# Altium PCB Power_PCB.PcbDoc
Units mil, origin at the board's own origin, x right, y up, seen from the top; angles counter-clockwise.
Board outline 3555.12 x 3523.62 mil, 2 copper layers (Top Layer 1, Bottom Layer 1); 42 components, 26 nets, 116 pads, 60 vias.
Unrouted connection lines stored in the file: 1.
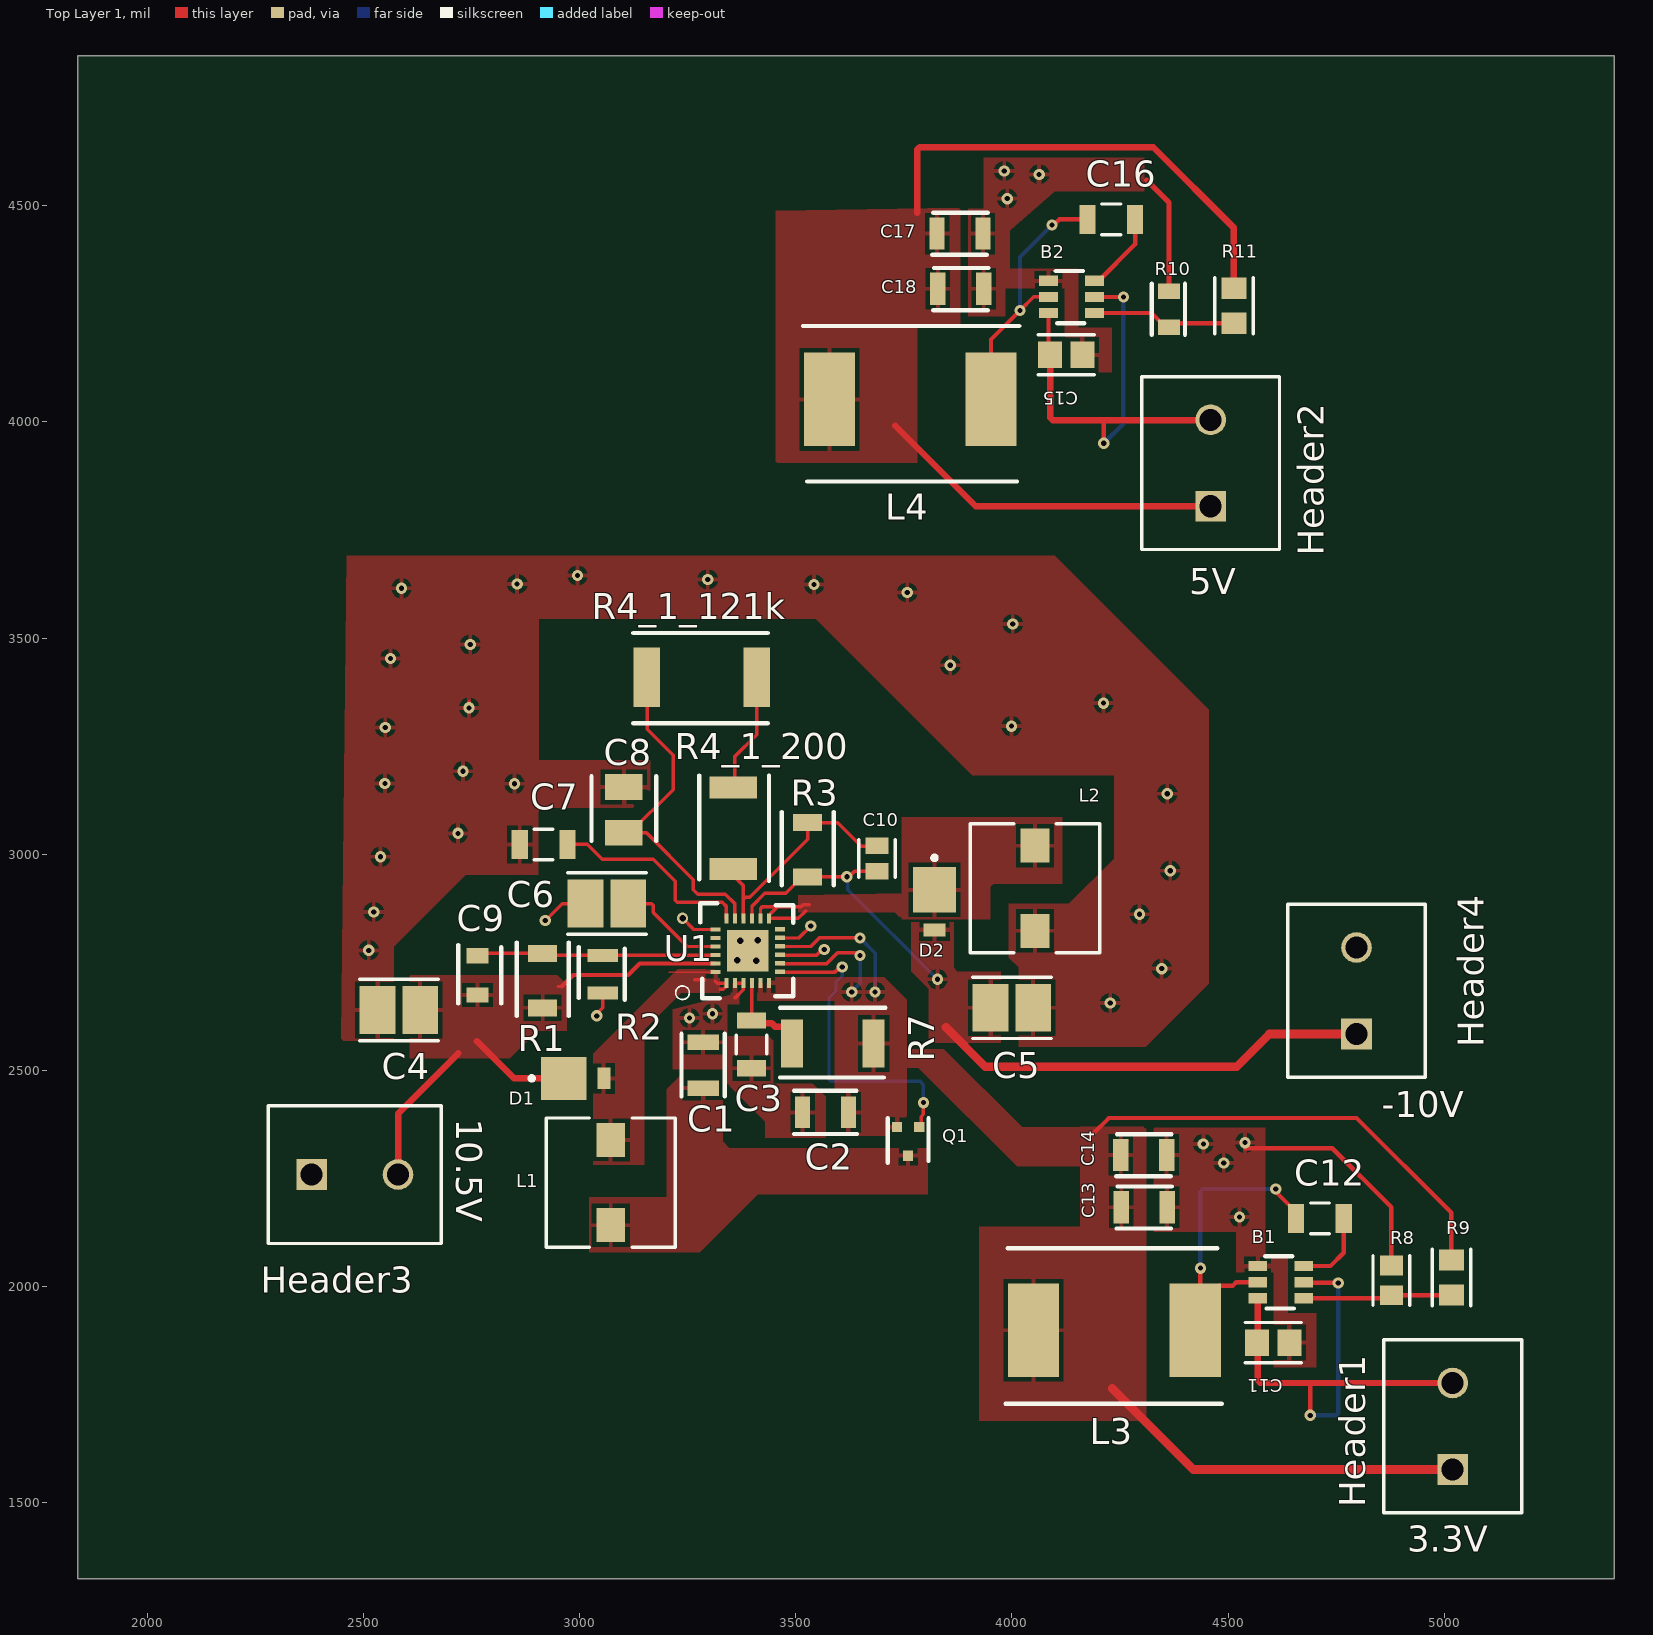
[diagram p0: Top Layer 1 view]
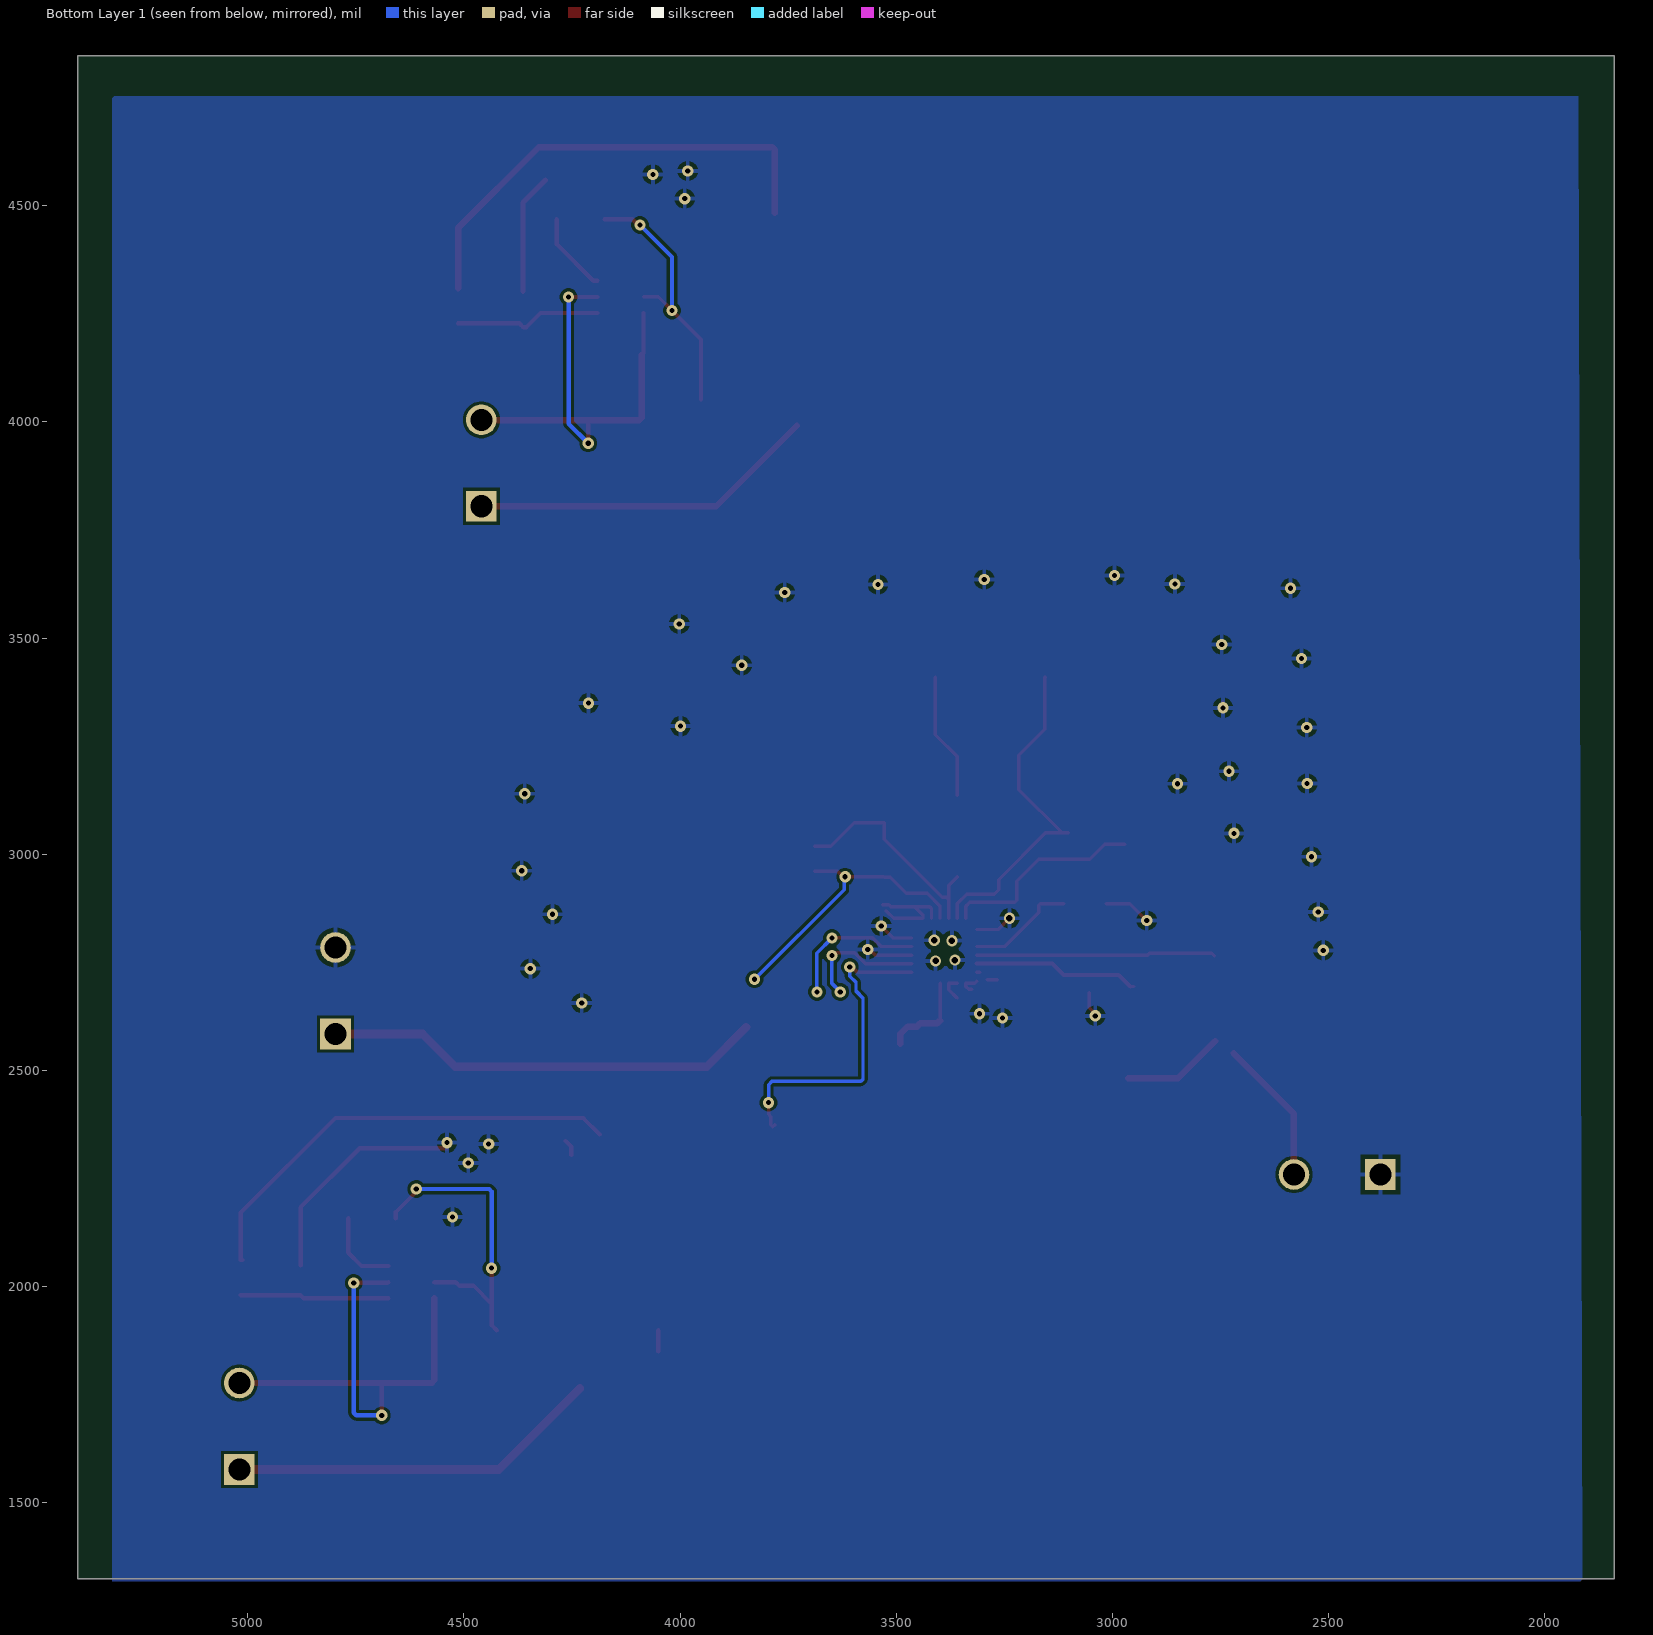
[diagram p1: Bottom Layer 1 view, seen from below]

## Layer stack, top to bottom
Top Solder: solder mask 0.4, Solder Resist, Dk 3.5
Top Layer 1: signal copper 1.378
Dielectric 1: dielectric 12.6, FR-4, Dk 4.8
Bottom Layer 1: signal copper 1.378
Bottom Solder: solder mask 0.4, Solder Resist, Dk 3.5

## Board outline
1838.58,1323.82 5393.7,1323.82 5393.7,4847.44 1838.58,4847.44

## Design rules (kind name [scope] priority, off if disabled: settings)
Clearance Clearance_2 [All] p1: gap=7 ignorepadtopadclearanceinfootprint=TRUE
Clearance Clearance_1 [All] p2: gap=7 ignorepadtopadclearanceinfootprint=FALSE
Clearance [All] p3: gap=7 ignorepadtopadclearanceinfootprint=TRUE
PolygonConnect [All] p1: connectstyle=Relief reliefconductorwidth=10 reliefentries=4 polygonreliefangle="90 Angle" airgapwidth=10
RoutingVias [All] p1: holewidth=15 width=50 viastyle="Through Hole" minholewidth=10 minwidth=15 maxholewidth=50 maxwidth=100
SolderMaskExpansion [All] p1: expansion=4 istentingtop=FALSE
Width [All] p1: maxlimit=20 minlimit=8 preferedwidth=8 minimp=50.000000 maximp=50.000000 favimp=50.000000
30 further rules are at their usual default settings.

## Components (designator, comment, footprint, x,y, rotation, side; value= is the part's Value field where it differs from the comment)
B1 "" PCBCOMPONENT_1 4568.9,2047.24 r0 top (schematic designator B2)
B2 "" PCBCOMPONENT_1 4084.65,4326.77 r0 top (schematic designator B3)
C1 "Comment" C1206C475K8PAC7800 3285.43,2564.96 r0 top
C2 "Comment" C1206C475K8PAC7800 3515.75,2402.56 r90 top
C3 "Comment" FP-C1206C-EB-MFG 3397.64,2560.04 r90 top
C4 "Comment" FP-GRM32E-0_3-0_2-IPC_A 2581.69,2639.76 r180 top
C5 "Comment" FP-GRM32E-0_3-0_2-IPC_A 4000,2644.68 r0 top
C6 "Comment" FP-GRM32E-0_3-0_2-IPC_A 3062.99,2885.83 r0 top
C7 "Comment" FP-C1206C-EB-MFG 2916.34,3022.64 r0 top
C8 "Comment" 12063C224JAT2A 3102.36,3155.51 r0 top
C9 "Comment" 885012007027 2763.78,2764.76 r0 top
C10 "C0805C759D5GACTU" FP-C0805C-DN-MFG 3687.99,2990.16 r270 top value="7.5 pF" (schematic designator C64)
C11 "UMK212BBJ225MD-T" FP-0805-L_2_0_0_2-W_1_25-IPC_A 4604.42,1870.08 r0 top (schematic designator C47)
C12 "Comment" FP-C1206C-EB-MFG 4712.6,2157.48 r0 top
C13 "Comment" Cap22uF_C1206C226M4PAC7800 4252.95,2183.07 r90 top value=22uF (schematic designator C49)
C14 "Comment" Cap22uF_C1206C226M4PAC7800 4251.97,2304.13 r90 top value=22uF (schematic designator C50)
C15 "UMK212BBJ225MD-T" FP-0805-L_2_0_0_2-W_1_25-IPC_A 4125.98,4155.51 r0 top (schematic designator C51)
C16 "Comment" FP-C1206C-EB-MFG 4229.93,4468.91 r0 top
C17 "Comment" Cap22uF_C1206C226M4PAC7800 3826.77,4436.02 r90 top value=22uF (schematic designator C53)
C18 "Comment" Cap22uF_C1206C226M4PAC7800 3828.74,4308.07 r90 top value=22uF (schematic designator C54)
D1 "MBRM120ET3G" ONSC-POWERMITE-2-457-04_D_V 3015.75,2481.3 r0 top
D2 "MBRM120ET3G" ONSC-POWERMITE-2-457-04_D_V 3820.87,2864.76 r270 top
Header1 "Comment" PHOE-1729128-2_V#1 5019.69,1676.57 r90 top
Header2 "Comment" PHOE-1729128-2_V#1 4459.65,3904.92 r90 top
Header3 "Comment" PHOE-1729128-2_V#2 2479.72,2258.86 r0 top
Header4 "Comment" PHOE-1729128-2_V#1 4797.24,2684.06 r90 top
L1 "7447789004" WE-PD-S-PB 3071.85,2240.16 r90 top
L2 "7447789004" WE-PD-S-PB 4053.15,2921.26 r90 top
L3 "Comment" MSS1260H-822MED 4050.2,1898.62 r90 top
L4 "Comment" MSS1246H-103MED 3951.77,4052.17 r270 top
Q1 "Comment" PCBComponent_1 3759.84,2369.09 r0 top
R1 "Comment" RMF1206_1Mohm 2914.37,2770.67 r0 top
R2 "Comment" RGV3216P-1303-B-T1 3053.15,2765.75 r0 top
R3 "Comment" RMEF1206FT1M00 3527.56,3072.83 r0 top
R4_1_121k "Comment" RMCF2512FT121k 3155.51,3409.45 r90 top
R4_1_200 "Comment" RMCP2010FT200R 3355.32,3154.53 r0 top
R7 "Comment" RMCP2010FT100R 3491.14,2562.01 r90 top
R8 "RMCF0805FG22K1" FP-RMCF0805-IPC_B 4877.95,2013.78 r270 top (schematic designator R33)
R9 "RK73G2ATTD1003F" FP-RK73G2A-IPC_A 5016.73,2020.67 r270 top (schematic designator R32)
R10 "RMCF0805FT13K7CT-ND" RMCF0805FT13K7_13.7k 4363.19,4219.49 r180 top value=13.7K (schematic designator R35)
R11 "RK73G2ATTD1003F" FP-RK73G2A-IPC_A 4513.78,4268.7 r90 top (schematic designator R34)
U1 "Comment" TPS6513x 3388.78,2776.57 r0 top

## Footprints (in the part's own frame and the unit in brackets; to place one, negate y for a bottom-side part, rotate by r counter-clockwise, add the part's x,y. Pads: shape width x height; smd on the part's side, far side on the other; paste and mask are expansions set on the pad)
12063C224JAT2A [mm] "CAP CER .22uF 25V X7R 1206"
  rect 2.2x1.5 smd: 7(0,0) 8(0,-2.7)
  silkscreen extent -1.91,-3.17 1.91,0.64
885012007027 [mm] "CER 6.8pF 25V C0G/NP0 0805"
  rect 1.3x0.9 smd: 5(0,0) 6(0,-2.3)
  silkscreen extent -1.14,-2.79 1.4,0.64
C1206C475K8PAC7800 [mm] "4.7uF 10VX5R 1206"
  rect 1.85x0.9 smd: 13(0,0.003) 14(0,-2.7)
  silkscreen extent -1.27,-3.19 1.27,0.51
Cap22uF_C1206C226M4PAC7800 [mm]
  rect 1.9x0.9 smd: 7(0,0) 8(0,-2.7)
  silkscreen extent -1.25,-2.98 1.22,0.28
FP-0805-L_2_0_0_2-W_1_25-IPC_A [mil]
  rect 55.42x61.5 smd paste+0 mask+0: 1(-37.49,0) 2(37.49,0)
  silkscreen extent -65,-46 65,46, body extent -85,-50 85,50, height 10
FP-C0805C-DN-MFG [mm]
  rect 0.95x1.35 smd paste+0 mask+0: 1(-0.75,0) 2(0.75,0)
  silkscreen extent -1.1,-1.07 1.1,1.07, body extent -1.4,-0.85 1.4,0.85, height 0.25
FP-C1206C-EB-MFG [mm]
  rect 0.95x1.7 smd paste+0 mask+0: 1(-1.4,0) 2(1.4,0)
  silkscreen extent -0.55,-0.9 0.55,0.9, body extent -2,-1 2,1, height 0.25
FP-GRM32E-0_3-0_2-IPC_A [mil]
  rect 82.79x110.48 smd paste+0 mask+0: 1(-49.24,0) 2(49.24,0)
  silkscreen extent -91,-71 91,71, body extent -110,-75 110,75, height 10
FP-RK73G2A-IPC_A [mil]
  rect 49.42x57.56 smd paste+0 mask+0: 1(-40.37,0) 2(40.37,0)
  silkscreen extent -65,-45 65,45, body extent -85,-48 85,48, height 10
FP-RMCF0805-IPC_B [mil]
  rect 45.46x53.63 smd paste+0 mask+0: 1(-34.48,0) 2(34.48,0)
  silkscreen extent -57,-43 57,43, body extent -67,-37 67,37, height 10
MSS1246H-103MED [mm] "10uH"
  rect 5.5x3 smd: 3(0,0) 4(0,-9.5)
  silkscreen extent -4.32,-11.05 4.83,1.65
MSS1260H-822MED [mm] "8.2uH SMD"
  rect 5.5x3 smd: 3(0,0) 4(0,-9.5)
  silkscreen extent -4.32,-11.05 4.83,1.65
ONSC-POWERMITE-2-457-04_D_V [mil] "POWERMITE, 2-Leads, Body 1.965x1.9mm"
  rect 105.12x100 smd: 1(-52.56,0)
  rect 30x50 smd: 2(40,0)
  silkscreen extent -132,-5 -122,5, body extent -80,-37 -3,37, height 45
PCBCOMPONENT_1 [mm]
  rect 1.1x0.6 smd: CB(2.7,0) EN(2.7,-0.96) FB(2.7,-1.9) GND(0,0) SW(0,-0.95) VIN(0,-1.9)
  silkscreen extent 0.43,-2.5 2.11,0.57
PCBComponent_1 [mm]
  rect 0.6x0.6 smd: 15(-0.65,0) 16(0.65,0) 17(0,-1.7)
  silkscreen extent -1.2,-2.1 1.2,0.5
PHOE-1729128-2_V#1 [mm] "Receptacle, 2-Leads, Body 8.1x10.16mm, Pitch 5.08mm"
  rect 1.8x1.8 hole 1.3: 1(-2.54,0)
  round 1.8 hole 1.3: 2(2.54,0)
  silkscreen extent -5.08,-4.05 5.08,4.05, body extent -5.65,-4.05 5.08,4.05, height 10.01
PHOE-1729128-2_V#2 [mm] "Receptacle, 2-Leads, Body 8.1x10.16mm, Pitch 5.08mm"
  rect 1.8x1.8 hole 1.3: 1(-2.54,0)
  round 1.8 hole 1.3: 10.5(2.54,0)
  silkscreen extent -5.08,-4.05 5.08,4.05, body extent -5.65,-4.05 5.08,4.05, height 10.01
RGV3216P-1303-B-T1 [mm] "130kohm .1% .25W 1/4W 1206"
  rect 1.8x0.75 smd: 3(0,0) 4(0,-2.2)
  silkscreen extent -1.4,-2.6 1.3,0.5
RMCF0805FT13K7_13.7k [mm]
  rect 1.3x0.9 smd: 9(0,0) 10(0,-2.1)
  silkscreen extent -0.95,-2.55 1,0.45
RMCF2512FT121k [mm] "121k ohm RES 1% 1W 2512"
  rect 3.5x1.55 smd: 1(0,0) 2(0,-6.45)
  silkscreen extent -2.7,-7.1 2.6,0.8
RMCP2010FT100R [mm] "100 ohm 1% 1W 2010"
  rect 2.8x1.3 smd: 9(0,0) 10(0,-4.8)
  silkscreen extent -2,-5.5 2.1,0.7
RMCP2010FT200R [mm] "200 ohm 1% 1W 2010"
  rect 2.8x1.3 smd: 9(0,0) 10(0,-4.8)
  silkscreen extent -2,-5.5 2.1,0.7
RMEF1206FT1M00 [mm] "RES 1Mohm 1% 1/4W 1206"
  rect 1.7x1 smd: 1(0,0) 2(0,-3.2)
  silkscreen extent -1.52,-3.68 1.52,0.64
RMF1206_1Mohm [mm]
  rect 1.7x1 smd: 1(0,0) 2(0,-3.2)
  silkscreen extent -1.52,-3.68 1.52,0.64
TPS6513x [mm] "boost and inverter"
  rect 2.45x2.45 smd: 1(0,0)
  rect 0.6x0.25 smd: AGND(-1.9,1.254) BSW(1.9,-1.23) CP(-1.9,0.254) ENN(1.9,0.27) ENP(1.9,-0.73) FBP(-1.9,-0.246) INP(-1.9,-1.246) NC(-1.9,0.754) NC(1.9,1.27) PSN(1.9,0.77) PSP(1.9,-0.23) VPOS(-1.9,-0.746)
  rect 0.25x0.6 smd: CN(-1.254,1.9) FBN(-0.254,1.9) INN(0.746,-1.9) INN(1.246,-1.9) INP(-1.254,-1.9) OUTN(0.746,1.9) OUTN(1.246,1.9) PGND(-0.754,-1.9) PGND(-0.254,-1.9) VIN(0.246,-1.9) VNEG(0.246,1.9) VREF(-0.754,1.9)
  silkscreen extent -4.23,-2.87 2.67,2.79
WE-PD-S-PB [mm] "SMD Inductor, 2-Leads, Body 7.3x7.3x3.5 mm"
  rect 2x1.7 smd: 1(-2.5,0) 2(2.5,0)
  silkscreen extent -3.8,-3.8 3.8,3.8, body extent -3.65,-3.65 3.65,3.65, height 3.19

## Part data
B1 B2: library part Component_1
C1 C2 C3 C4 C8: library part CMP-2000-05439-1, "Chip Capacitor, 100 nF, +/- 10%, 16 V, -55 to 125 degC, 0402 (1005 Metric), RoHS, Tape and Reel / CL05B104KO5NNNC"
C5: library part CMP-2006-02792-2, "Chip Multilayer Ceramic Capacitors for General Purpose, 0603, 10uF, X5R, 15%, 20%, 6.3V / GRM188R60J106ME47D"
C6 C7: library part CMP-2008-04271-1, "GRM1555C1H180GA01D"
C9: library part CMP-2007-01008-2, "CAP CER 47UF 6.3V X5R 0805 / C0805C476M9PACTU"
C10: library part CMP-1036-00734-2, "CAP CER 7.5PF 50V NP0 0805", Capacitance="7.5 pF", Manufacturer=KEMET, Package=C0805C-DN, Temperature="-55°C to +125°C", Temperature Characteristic=C0G, Temperature Coefficient=30ppm/°C, Temperature Range High=+125°C, Temperature Range Low=-55°C, Tolerance="0.5 pF", Voltage Rating="50 V", Automotive=No, Category=Cap, ComponentLink2Description=Datasheet, ComponentLink2URL=https://content.kemet.com/datasheets/KEM_C1003_C0G_SMD.pdf, Device Class L1="Passive Components", Device Class L2=Capacitors, Device Class L3="Ceramic Capacitors", Digikey Description="CAP CER 7.5PF 50V NP0 0805", Height=0.88mm, Ipc Land Pattern Name=CAPC200125X78, Lead Free=Yes, Manufacturer Part Number=C0805C759D5GACTU, Material=Ceramic, Mouser Description="Multilayer Ceramic Capacitors MLCC - SMD/SMT 50volts 7.5pF C0G 0.5%", Octopart=https://octopart.com/c0805c759d5gactu-kemet-17134963, RoHS=TRUE
C11 C15: library part CMP-14477-004278-2, "Multilayer Ceramic Capacitor 2.2uF 50V X5R 20% SMD 0803 T/R", Capacitance=2.2uF, Case Code (Imperial)=0805, Case Code (Metric)=2012, Max Operating Temperature=85°C, Min Operating Temperature=-55°C, Tolerance=20%, Voltage Rating=50V, Case/Package=0805, Mount="Surface Mount", Packaging="Tape and Reel", RoHS Compliant=Yes
C12: library part CMP-2006-02836-2, "Chip Multilayer Ceramic Capacitors for General Purpose, 0603, 2.2uF, X7R, 15%, 10%, 10V / GRM188R71A225KE15D"
C13 C14 C17 C18: library part Cap, "Capacitor", LatestRevisionDate=17-Jul-2002, LatestRevisionNote="Re-released for DXP Platform.", PackageDescription="Radial Cap, Thru-Hole; 2 Leads; 0.3 in Pin Spacing", PackageReference=RAD-0.3, Published=8-Jun-2000, Publisher="Altium Limited"
C16: library part CMP-2000-05002-2, "CAP CER 0.1UF 16V X7R 0603"
D1 D2: library part CMP-1055-00280-1, "Schottky Power Rectifier, 2-Pin Powermite, Pb-Free, Tape and Reel", Manufacturer="On Semiconductor", ComponentLink1Description="Manufacturer URL", ComponentLink1URL=http://www.onsemi.com/, ComponentLink2Description=Datasheet, ComponentLink2URL=http://www.onsemi.cn/pub_link/Collateral/MBRM120E-D.PDF, ComponentLink3Description="Package Specification", ComponentLink3URL=http://www.onsemi.com/pub_link/Collateral/457-04.PDF, Configuration=Single, DatasheetVersion="Rev. 3", IFSM Max (A)=50, Mounting Technology="Surface Mount", PackageDescription="2-Pin POWERMITE, Body 1.965 x 1.9 mm", PackageReference=POWERMITE-2-457-04, PackageVersion="Rev. F, 05/2013", Packing="Tape and Reel", PartNumber=MBRM120ET3G, RoHS=TRUE
L1 L2: library part CMP-1396-00050-1, "SMD-Shielded Power Inductor WE-PD, L=4.70 µH", Inductance="4.70 ÂµH", Manufacturer="Wuerth Elektronik", ComponentLink1Description="Manufacturer URL", ComponentLink1URL=http://www.we-online.com, ComponentLink2Description=Datasheet, ComponentLink2URL=http://www.we-online.de/katalog/media/pdf/7447789004.pdf, PackageDescription="SMD Inductor, 2-Leads, Body 7.3 x 7.3 mm", PackageReference=WE-PD-S-PB, PartNumber=7447789004
L3 L4: library part Inductor, "Inductor"
Q1: library part MOSFET-P, "P-Channel MOSFET", LatestRevisionDate=17-Jul-2002, LatestRevisionNote="Re-released for DXP Platform.", PackageDescription="TO, Flat Index; 3 In-Line, Axial Leads; Body Dia. 4.6mm; Lead Dia. 0.5 mm (max)", PackageReference=E3, PackageVersion=1995/1996, Published=8-Jun-2000, Publisher="Altium Limited"
R1: library part CMP-1011-00001-2, "RC0402JR-070RL"
R2: library part CMP-2002-00609-3, "Chip Resistor, 1 MOhm, +/- 1%, 100 mW, -55 to 155 degC, 0402 (1005 Metric), RoHS, Tape and Reel / ERJ-2RKF1004X"
R3: library part CMP-2000-07588-1, "Chip Resistor, 10 KOhm, +/- 1%, 0.1 W, -55 to 155 degC, 0402 (1005 Metric), RoHS, Tape and Reel / ERJ2RKF1002X"
R7: library part CMP-2100-03671-1, "Chip Resistor, 1 KOhm, +/- 1%, 125 mW, -55 to 155 degC, 0805 (2012 Metric), RoHS, Tape and Reel"
R8: library part CMP-26527-006791-1, "22.1kΩ ±1% 0.125W 0805 Thick Film Chip Resistor AEC-Q200 compliant", Case Code (Imperial)=0805, Case Code (Metric)=2012, Max Operating Temperature=155°C, Max Power Dissipation=125mW, Min Operating Temperature=-55°C, Package Quantity=10000, Resistance=22.1kR, Resistor Type="Thick Film", Temperature Coefficient=100ppm/°C, Tolerance=1%, Case/Package=0805, Contact Plating=Tin, Features="Automotive AEC-Q200", Height=0.026inch, Lead Free="Lead Free", Length=0.079inch, Mount="Surface Mount", Number of Terminations=2, Packaging="Tape and Reel", Radiation Hardening=No, RoHS Compliant=Yes, Series=RMCF, Width=0.049inch
R9 R11: library part CMP-04015-080178-1, "100kΩ ±1% 0.125W Chip Resistor 0805 Thick Film AEC-Q200 Qualified", Case Code (Imperial)=0805, Case Code (Metric)=2012, Max Operating Temperature=125°C, Min Operating Temperature=-55°C, Power Rating=125mW, Resistance=100kR, Temperature Coefficient=50ppm/°C, Tolerance=1%, Voltage Rating=150V, Packaging="Tape and Reel", RoHS Compliant=Yes, Series=RK73G, Termination=SMD/SMT
R10: library part Res1, "Resistor", LatestRevisionDate=17-Jul-2002, LatestRevisionNote="Re-released for DXP Platform.", PackageDescription="Axial Device, Thru-Hole; 2 Leads; 0.3 in Pin Spacing", PackageReference=AXIAL-0.3, Published=8-Jun-2000, Publisher="Altium Limited"

## Via types
v1: diameter 26, hole 12, Top Layer 1 to Bottom Layer 1, 55 vias
v2: diameter 26, hole 15, Top Layer 1 to Bottom Layer 1, 5 vias

## Nets (pads, with @x,y where several pads share a name; then routed paths per layer and width w, separated by ;. In a path a pad name is that pad's centre, name@x,y a point inside that pad or via, vN(x,y) a via of type N, cw(c..) or ccw(c..) an arc to the next point about the centre after c; other vN are vias at no path point)
3.3V: C2.14 C13.7 C14.7 Header1.1 L3.3 Q1.15 R7.10 R9.1 U1.ENN U1.ENP U1.INN | length 2625.2
  Top Layer 1 w8: U1.ENP@3463.58,2747.05 3571.85,2747.05 3596.46,2771.65 3637.85,2771.65 3643.75,2765.75 v1(3648.62,2765.75) ; U1.ENN@3463.58,2786.42 3534.65,2786.42 3554.76,2806.53 3648.2,2806.53 v1(3648.62,2806.1)
  Top Layer 1 w10: L3.3@4050.2,1849.41 L3.3 ; 4186.02,2351.38 4224.41,2389.76 4797.24,2389.76 5016.73,2170.28 R9.1 R9.1@5012.66,2061.04 ; C14.7 4251.97,2323.82 C14.7@4264.69,2336.54
  Top Layer 1 w20: 4232.28,1763.78 4419.49,1576.57 Header1.1
  Bottom Layer 1 w8: v1(3629.27,2681.49) 3648.62,2700.84 v1(3648.62,2765.75) ; v1(3648.62,2806.1) 3683.41,2771.32 v1(3683.41,2681.49)
5V: C17.7 C18.7 Header2.1 L4.4 R11.2 | length 1907.9
  Top Layer 1 w10: 3778.54,4482.28 3780.51,4484.25
  Top Layer 1 w15: 3730.31,3991.14 3916.54,3804.92 Header2.1 ; 3780.51,4484.25 3780.51,4629.97 3786.37,4635.83 4326.77,4635.83 4513.78,4448.82 R11.2
10.5V: C4.1 C9.6 D1.1 Header3.10.5 R1.2 U1.VPOS | length 959.6
  Top Layer 1 w8: 2950.79,2693.9 2958.66,2693.9
  Top Layer 1 w10: 2958.66,2693.9 2985.24,2720.47 3112.2,2720.47 3138.78,2747.05 U1.VPOS@3313.98,2747.05
  Top Layer 1 w15: Header3.10.5 2579.72,2399.61 2719.16,2539.04 ; 2762.31,2567.29 2848.3,2481.3 D1.1
-10V: C5.1 C10.2 D2.2 Header4.1 R3.2 U1.VNEG | length 1694.7
  Top Layer 1 w8: U1.VNEG@3398.62,2851.38 3398.62,2880.02 3428.05,2909.45 3476.38,2909.45 3513.78,2946.85 R3.2 3528.54,2947.83 v1(3618.11,2947.83) 3622.98,2947.83 3635.78,2960.63 C10.2
  Top Layer 1 w20: 3847.44,2599.41 3938.98,2507.87 4519.69,2507.87 4595.87,2584.06 Header4.1
  Bottom Layer 1 w8: v1(3618.11,2947.83) 3620.42,2945.52 3620.42,2917.96 v1(3827.76,2710.63)
BSW: Q1.16 U1.BSW | length 753.5
  Top Layer 1 w8: U1.BSW@3463.58,2727.36 3590.6,2727.36 3602.41,2739.17 v1(3607.28,2739.17) ; Q1.16@3780.51,2374.02 Q1.16 3790.27,2373.93 3790.27,2392.91 3795.28,2397.91 v1(3795.28,2425.2)
  Bottom Layer 1 w8: v1(3607.28,2739.17) 3607.28,2717.88 3593.01,2703.6 3593.01,2683.42 3576.77,2667.18 3576.77,2479.1 3581.46,2474.41 3787.4,2474.41 3795.28,2466.54 v1(3795.28,2425.2)
CB1: B1.CB C12.2 | length 184.9
  Top Layer 1 w10: B1.CB 4737.2,2047.24 4767.72,2077.76 C12.2
CB2: B2.CB C16.2 | length 186.9
  Top Layer 1 w10: B2.CB 4200.79,4326.77 4285.05,4411.04 C16.2
CN: C7.2 U1.CN | length 480.7
  Top Layer 1 w8: C7.2 3017.72,3022.64 3052.17,2988.19 3170.28,2988.19 3221.46,2937.01 3221.46,2893.47 3226.14,2888.78 3329.72,2888.78 3339.57,2878.94 U1.CN@3339.57,2851.38
CP: C6.2 U1.CP | length 252.6
  Top Layer 1 w8: C6.2 3166.05,2885.83 3170.28,2881.6 3170.28,2865.09 3248.95,2786.42 U1.CP@3313.98,2786.42
EN1: 
EN2: 
FB1: B1.FB R8.2 R9.2 | length 344.8
  Top Layer 1 w10: B1.FB 4871.09,1972.44 R8.2 5015.74,1979.3 R9.2
FB2: B2.FB R10.9 R11.1 | length 339.9
  Top Layer 1 w10: B2.FB 4322.83,4251.97 4355.31,4219.49 R10.9 4372.03,4228.33 R11.1
FBN: C10.1 R3.1 R4_1_200.10 U1.FBN | length 532.3
  Top Layer 1 w8: R4_1_200.10@3358.27,2947.83 3378.94,2927.17 3378.94,2895.9 ; U1.FBN@3378.94,2851.38 3378.94,2895.9 ; C10.1@3687.99,3018.7 3651.57,3018.7 3597.44,3072.83 R3.1 3527.56,3034.41 3393.74,2900.59 3383.62,2900.59 3378.94,2895.9
FBP: C9.5 R1.1 R2.3 U1.FBP | length 555.1
  Top Layer 1 w8: C9.5 2769.68,2770.67 R1.1 2919.29,2765.75 R2.3 3054.13,2766.73 U1.FBP@3313.98,2766.73
GND: B1.GND B2.GND C1.13 C2.13 C3.1 C4.2 C5.2 C6.1 C7.1 C8.7 C11.2 C13.8 C14.8 C15.2 C17.8 C18.8 Header3.1 Header4.2 L2.1 R2.4 R8.1 R10.10 U1.1 U1.AGND U1.PGND U1.PSN U1.PSP | length 1331.3
  Top Layer 1 w8: v1(2744.09,3338.58) 2744.09,3352.58 ; v1(2920.28,2846.46) 2959.65,2885.83 C6.1 ; v1(3039.37,2625.98) 3039.37,2630.86 3053.15,2644.63 R2.4 ; v2(3238,2852) 3264.21,2825.79 U1.AGND@3313.98,2825.79 ; 3359.25,2667.32 3378.21,2686.28 3378.21,2701.05 3378.94,2701.77 U1.PGND@3359.25,2701.77 ; U1.PSP@3463.58,2766.73 3548.28,2766.73 3561.07,2779.53 v1(3565.94,2779.53) ; U1.PSN@3463.58,2806.1 3506.89,2806.1 v1(3534.45,2833.66)
  Top Layer 1 w10: v1@4539.37,2319.88 4741.14,2319.88 4877.95,2183.07 R8.1
  Top Layer 1 w12: 4311.02,4560.04 4363.19,4507.87 R10.10
  other v1: 4526.57,2160.43 4490.16,2285.43 4442.91,2329.72 4539.37,2332.68 3253.94,2621.06 3307.09,2630.91 4227.36,2655.51 4346.46,2735.24 2511.81,2777.56 4295.28,2861.22 2523.62,2866.14 4366.14,2961.61 2539.37,2994.09 2718.5,3048.23 4359.25,3139.76 2549.21,3163.39 2849,3163 2730.32,3191.93 2550.2,3293.31 3999.02,3296.26 4211.8,3349.49 3857.28,3437.01 2562.01,3452.76 2746.86,3485 4001.97,3532.48 3757.87,3605.32 2587.6,3615.16 3542.4,3623.94 2855.32,3625 3296.26,3635.83 2995.08,3644.68 3989.17,4516.73 4062.99,4572.83 3982.28,4580.71
  other v2: 3409,2753 3364,2755 3371,2800 3412,2801
I1: C1.14 L1.1 Q1.17
I2: R4_1_121k.2 R4_1_200.9 | length 293.8
  Top Layer 1 w8: R4_1_200.9@3358.27,3136.81 3358.27,3225.39 3409.45,3276.57 R4_1_121k.2
I3: 
INP: D1.2 L1.2 U1.INP | length 82.2
  Top Layer 1 w8: 3265.75,2709.65 3289.17,2709.65 ; U1.INP@3306.89,2727.36 U1.INP@3313.98,2727.36 ; 3313.98,2706.46 3318.66,2701.77 3339.57,2701.77 3339.57,2694.69 3332.15,2687.27 3325.54,2687.27
OUTN: D2.1 L2.2 U1.OUTN | length 268.6
  Top Layer 1 w8: U1.OUTN@3418.31,2851.38 3418.31,2874.25 3422.99,2878.94 3458.46,2878.94 ; 3523.62,2869.09 3505.91,2851.38 3437.99,2851.38 3437.99,2858.46 3458.46,2878.94 ; 3531.5,2882.87 3516.73,2882.87 3512.8,2878.94 3458.46,2878.94
SW1: B1.SW C12.1 L3.4 | length 743.6
  Top Layer 1 w10: L3.4 4436.02,1910.43 L3.4@4436.02,1959.65 ; v1(4436.02,2042.32) L3.4@4436.02,1959.65 ; B1.SW 4519.23,2009.84 4511.28,2001.89 4478.27,2001.89 L3.4@4436.02,1959.65 ; v1(4610.24,2225.39) 4613.3,2222.33 4613.3,2216.43 4657.48,2172.24 C12.1
  Bottom Layer 1 w10: v1(4436.02,2042.32) 4436.02,2219.54 4441.88,2225.39 v1(4610.24,2225.39)
SW2: B2.SW C16.1 L4.3 | length 628.6
  Top Layer 1 w8: v1(4018.7,4257.87) 4050.2,4289.37 B2.SW
  Top Layer 1 w10: L4.3 3951.77,4190.94 v1(4018.7,4257.87) ; v1(4092.52,4455.71) 4096.85,4455.71 4110.05,4468.91 C16.1
  Bottom Layer 1 w10: v1(4018.7,4257.87) 4018.7,4381.89 v1(4092.52,4455.71)
Vin: B1.EN B1.VIN B2.EN B2.VIN C11.1 C15.1 Header1.2 Header2.2 | length 2262.4
  Top Layer 1 w10: B2.VIN 4084.65,4159.36 C15.1 ; B2.EN 4191.14,4289.17 4257.68,4289.17 v1(4257.87,4289.37) ; v1(4212.6,3950.79) 4212.6,4002.95 4213.58,4003.94 ; Header2.2@4458.66,4003.94 Header2.2 ; 4568.9,1782.43 4574.76,1776.57 ; B1.EN 4676.02,2008.62 4754.33,2008.62 v1(4755.16,2007.79) ; v1(4690.2,1701.69) 4690.2,1775.83 4690.94,1776.57
  Top Layer 1 w15: C15.1 4088.5,4009.8 4094.35,4003.94 4213.58,4003.94 Header2.2@4458.66,4003.94 ; 4568.9,1782.43 B1.VIN ; 4574.76,1776.57 4690.94,1776.57 Header1.2
  Bottom Layer 1 w10: v1(4212.6,3950.79) 4257.87,3996.06 v1(4257.87,4289.37) ; v1(4690.2,1701.69) 4749.31,1701.69 4755.16,1707.55 v1(4755.16,2007.79)
VinBI: C3.2 R7.9 U1.VIN | length 215
  Top Layer 1 w8: C3.2@3398.62,2615.16 C3.2 3397.64,2685.3 3397.66,2691.1 3397.9,2691.33 3397.9,2701.05 U1.VIN@3398.62,2701.77
  Top Layer 1 w15: C3.2@3398.62,2615.16 3405.44,2608.34 3444.81,2608.34 3451.84,2601.31 3473.05,2601.31 3491.14,2583.22 R7.9
VREF: C8.8 R4_1_121k.1 U1.VREF | length 798.6
  Top Layer 1 w8: C8.8 C8.8@3116.14,3049.21 ; R4_1_121k.1 3156,3408.96 3156,3289 3216,3229 3216,3149.07 C8.8@3116.14,3049.21 ; U1.VREF@3359.25,2851.38 3359.25,2885.08 3336.57,2907.76 3273.2,2907.76 3262.8,2918.17 3262.8,2940.94 3154.53,3049.21 C8.8@3116.14,3049.21
pads on no net: U1.NC

## Polygon pours and split planes (outlines as drawn)
GND on Top Layer 1 "GND_L01_P022" (solid, pour order 22): 2447.83,2568.9 2448.82,2567.91 2569.88,2567.91 2569.88,2786.42 2736.22,2952.76 2904.53,2952.76 2904.53,3097.44 2905.51,3098.43 2905.51,3545.28 3546.26,3545.28 3908.46,3183.07 4236.22,3183.07 4236.22,2989.17 4131.89,2884.84 3993.11,2884.84 3993.11,2760.83 4015.94,2738 4015.94,2554.02 4309.92,2554.02 4455.71,2699.8 4455.71,3334.65 4099.41,3690.94 2460.63,3690.94
GND on Top Layer 1 "GND_L01_P029" (solid, pour order 29): 2898,3217 3163,3217 3163,3148 3123,3108 2898,3108
INP on Top Layer 1 "INP_L01_P014" (solid, pour order 14): 3226.55,2733.44 3031.5,2538.39 3031.5,2281.5 3149.61,2281.5 3149.61,2593.5 3235.24,2679.13 3325.79,2679.13 3325.79,2735.27
no net on Top Layer 1 "NONET_L01_P013" (solid, pour order 13): 3313.98,2727.36 3205.71,2727.36
GND on Top Layer 1 "GND_L01_P011" (solid, pour order 11): 3349.41,2715.55 3349.41,2675.2 3215.55,2641.73 3215.55,2502.95 3341.54,2502.95 3341.54,2652.56 3369.09,2652.56 3369.09,2730.32 3349.41,2730.32 3348.43,2731.3
3.3V on Top Layer 1 "3.3V_L01_P010" (solid, pour order 10): 3410.43,2715.55 3410.43,2660.43 3590.55,2660.43 3590.55,2348.43 3756.89,2348.43 3756.89,2663.39 3704.72,2715.55
10.5V on Top Layer 1 "10.5V_L01_P016" (solid, pour order 16): 2606.3,2721.39 2606.3,2527.56 2838.58,2527.56 2902.56,2591.54 2970.47,2591.54 2970.47,2697.83 2947.83,2720.47
GND on Top Layer 1 "GND_L01_P025" (solid, pour order 25): 3935.04,4490.87 3935.04,4611.22 4306.1,4611.22 4306.1,4602.36 4306.1,4533.46 4083.66,4533.46 4029.53,4479.33 3974.94,4479.33
GND on Top Layer 1 "GND_L01_P028" (solid, pour order 28): 3341.54,2468.5 3429.13,2380.91 3429.13,2344.49 3567.91,2344.49 3568.9,2345.47 3568.9,2438.98 3539.37,2468.5
GND on Top Layer 1 "GND_L01_P026" (solid, pour order 26): 4131.05,4562.01 4057.62,4562.01 3974.41,4478.8 3974.41,4424.95
3.3V on Top Layer 1 "3.3V_L01_P024" (solid, pour order 24): 3755.91,2550.2 3754.92,2549.21 3756.89,2505.91 3783.46,2505.91 4011.81,2277.56 4164.37,2277.56 4168.31,2281.5 4168.31,2368.11 4023.62,2368.11 3842.52,2549.21
-10V on Top Layer 1 "-10V_L01_P020" (solid, pour order 20): 3865.16,2845.47 3865.16,2737.2 3874.02,2728.35 3974.41,2728.35 3974.41,2563.98 3807.09,2563.98 3807.09,2688.98 3766.73,2729.33 3766.73,2845.47
OUTN on Top Layer 1 "OUTN_L01_P019" (solid, pour order 19): 3505.91,2904.53 3505.91,2865.16 3729.33,2865.16 3745.08,2849.41 3750,2909.46
OUTN on Top Layer 1 "OUTN_L01_P018" (solid, pour order 18): 3949.8,2849.41 3949.8,2924.21 3957.68,2932.09 4116.14,2932.09 4116.14,3085.63 3745.08,3085.63 3745.08,2849.41
I1 on Top Layer 1 "I1_L01_P015" (solid, pour order 15): 3021.65,2206.69 3021.65,2078.74 3277.56,2078.74 3412.4,2213.58 3805.12,2213.58 3805.12,2319.88 3346.46,2319.88 3330.71,2335.63 3330.71,2491.14 3236.22,2491.14 3201.77,2456.69 3201.77,2206.69
GND on Top Layer 1 "GND_L01_P012" (solid, pour order 12): 3341.54,2578.74 3437.99,2578.74 3447.83,2568.9 3447.83,2467.52 3342.52,2467.52 3341.54,2468.5
GND on Top Layer 1 "GND_L01_P009" (solid, pour order 9): 3898.62,4493.11 3898.62,4245.08 3983.27,4245.08 3984.25,4246.06 3984.25,4309.06 4122.05,4309.06 4122.05,4115.16 4231.3,4115.16 4231.3,4218.5 4153.54,4218.5 4153.54,4354.33 3995.08,4354.33 3995.08,4493.11
5V on Top Layer 1 "5V_L01_P008" (solid, pour order 8): 3879.92,4496.06 3879.92,4217.52 3781.5,4217.52 3780.51,4218.5 3780.51,3905.51 3454.72,3905.51 3452.76,3907.48 3453.74,3908.46 3453.74,4489.17
GND on Top Layer 1 "GND_L01_P003" (solid, pour order 3): 4327.76,2368.11 4327.76,2126.97 4518.7,2126.97 4518.7,2032.48 4605.31,2032.48 4605.31,1812.99 4703.74,1812.99 4703.74,1937.99 4638.78,1937.99 4637.8,1938.98 4637.8,2066.93 4581.69,2066.93 4585.63,2070.87 4585.63,2367.13
3.3V on Top Layer 1 "3.3V_L01_P000" (solid, pour order 0): 4303.15,2371.06 4311.02,2363.19 4311.02,1688.98 3924.21,1688.98 3924.21,2137.8 4155.51,2137.8 4158.46,2140.75 4158.46,2369.09
GND on Bottom Layer 1 "GND_L02_P027" (solid, pour order 27): 1922.24,4753.94 5309.06,4753.94 5313.98,4749.02 5313.98,1317.91 1917.32,1317.91 1912.4,1322.83

## Silkscreen, mask and mechanical layers (free items; w line width, h text height)
Top Overlay:
  text "5V" at 4410,3602 h60
  text "-10V" at 4856,2391 h60
  text "10.5V" at 2714,2388 h60 r270
  text "3.3V" at 4915,1386 h60
Mechanical 1:
  the board outline again, w47.24